# Altium PCB PCB2.PcbDoc
Units mm, origin at the board's own origin, x right, y up, seen from the top; angles counter-clockwise.
Board outline 99.69 x 73.02 mm, 2 copper layers (Top Layer, Bottom Layer); 42 components, 30 nets, 105 pads, 0 vias.
Unrouted connection lines stored in the file: 72.
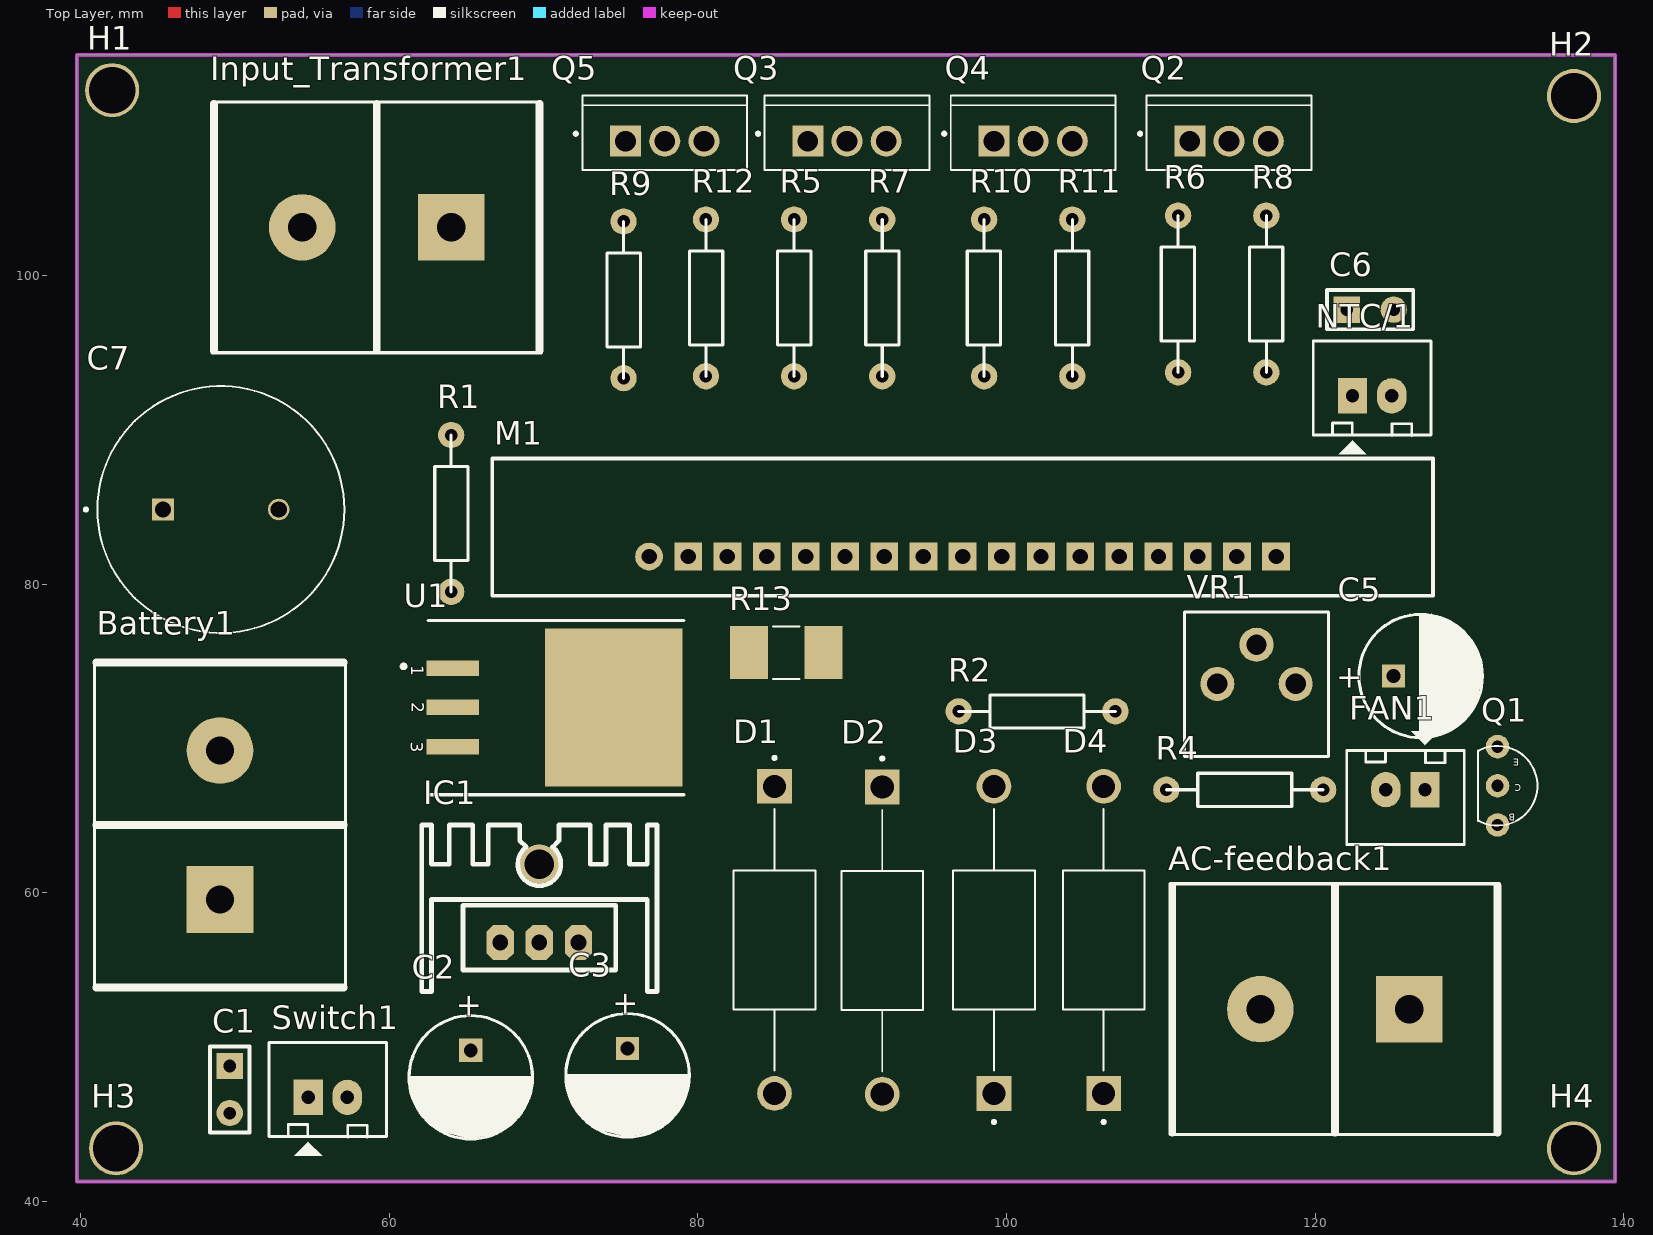
[diagram p0: Top Layer view]
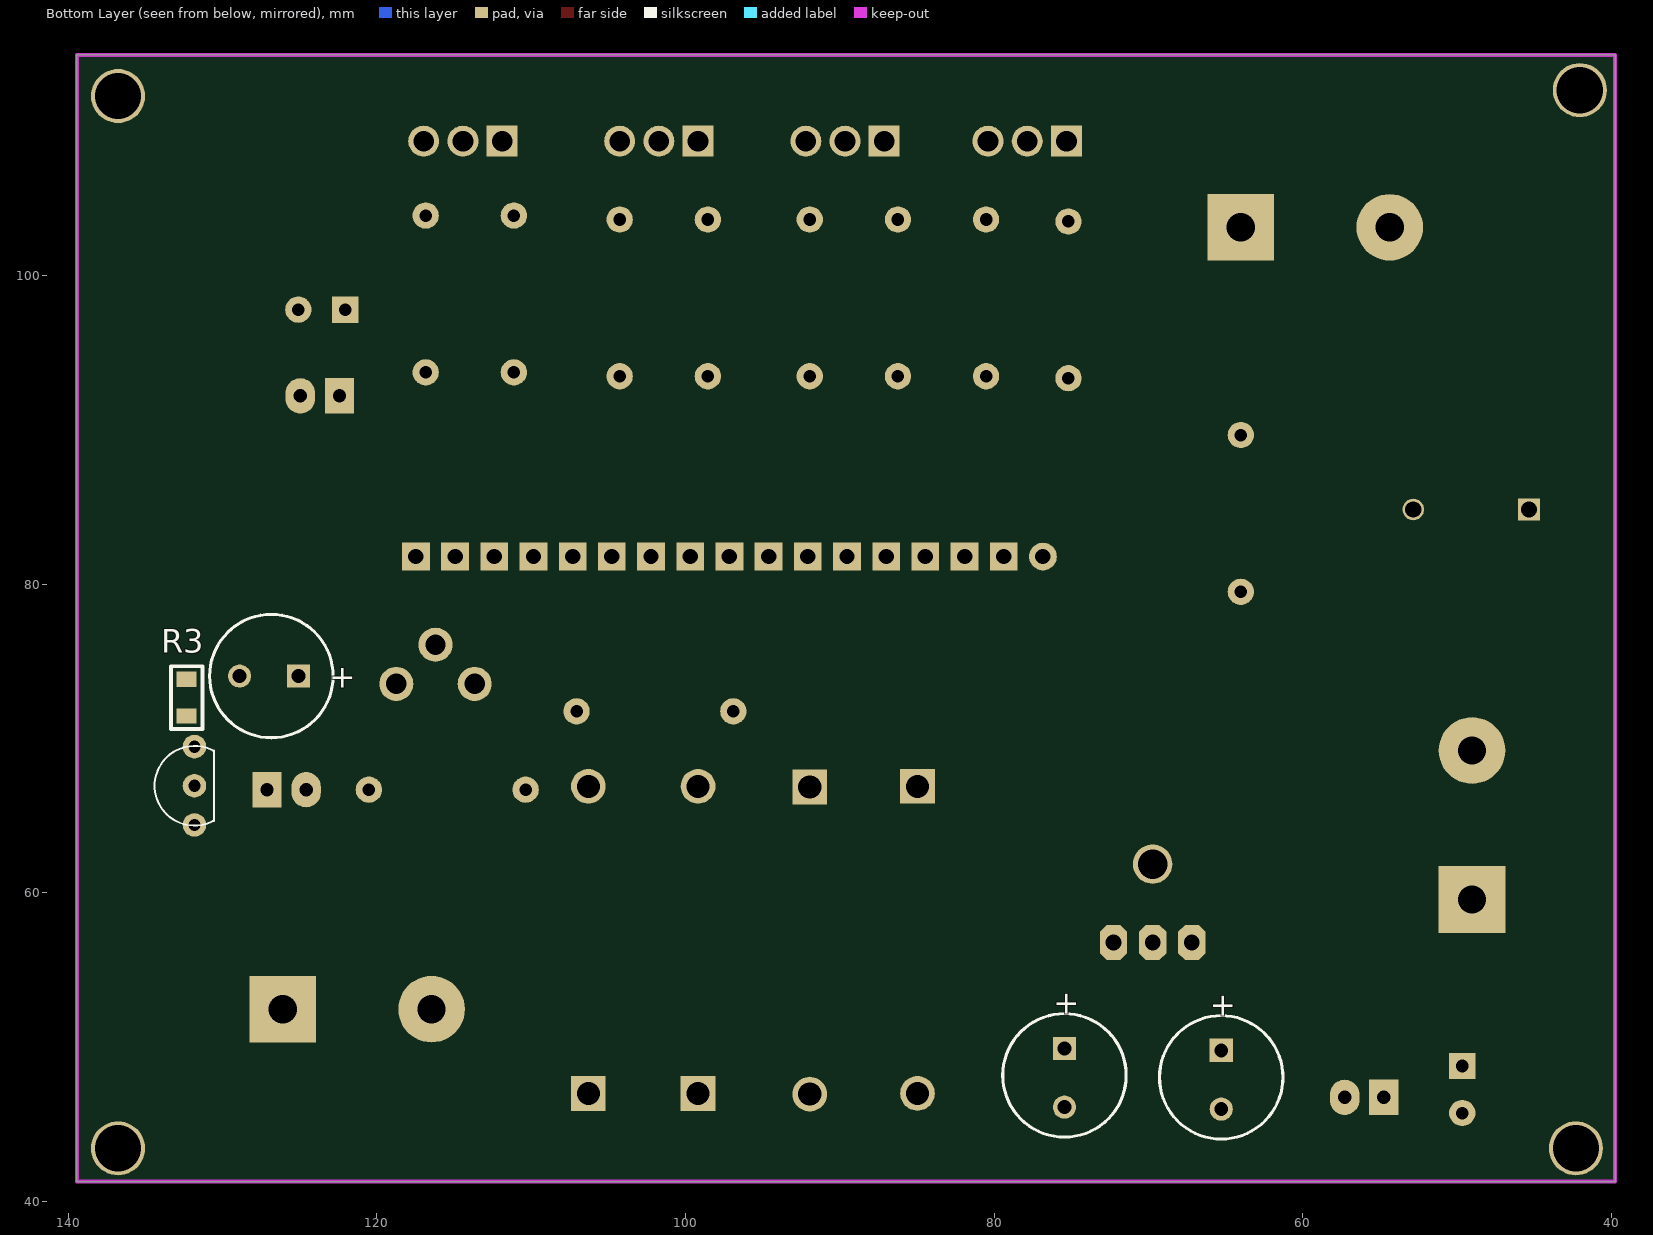
[diagram p1: Bottom Layer view, seen from below]

## Layer stack, top to bottom
Top Solder: solder mask 0.0102, Solder Resist, Dk 3.5
Top Layer: signal copper 0.0356
Dielectric 1: dielectric 0.32, FR-4, Dk 4.8
Bottom Layer: signal copper 0.0356
Bottom Solder: solder mask 0.0102, Solder Resist, Dk 3.5

## Board outline
39.751,41.275 39.751,114.3 139.446,114.3 139.446,41.275

## Design rules (kind name [scope] priority, off if disabled: settings)
Clearance [All] p1: gap=0.254 ignorepadtopadclearanceinfootprint=FALSE
PolygonConnect [All] p1: connectstyle=Relief reliefconductorwidth=0.254 reliefentries=4 polygonreliefangle="90 Angle" airgapwidth=0.254
RoutingVias [All] p1: holewidth=0.711 width=1.27 viastyle="Through Hole" minholewidth=0.711 minwidth=1.27 maxholewidth=0.711 maxwidth=1.27
SolderMaskExpansion [All] p1: expansion=0.102 istentingtop=FALSE
Width [All] p1: maxlimit=0.254 minlimit=0.254 preferedwidth=0.254
30 further rules are at their usual default settings.

## Components (designator, comment, footprint, x,y, rotation, side; value= is the part's Value field where it differs from the comment)
AC-feedback1 "Header 2" "PTBlock 2" 126.111,52.451 r180 top
Battery1 "Header 2" "PTBlock 2" 49.022,59.563 r90 top
C1 "Cap Non-pol" "Cap Non-Pol 3mm" 49.657,47.244 r270 top value=100nF
C2 "1uF" "RADIAL E" 65.278,49.784 r270 top
C3 "1uF" "RADIAL E" 75.438,49.911 r270 top
C5 "Cap Pol" "RADIAL E" 125.095,74.041 r0 top value=10uF
C6 "Cap Non-pol" "Cap Non-Pol 3mm" 123.571,97.79 r0 top value=100nF
C7 "1000uF" CAPPRD750W80D1600H2500 49.082,84.836 r0 top
D1 "1N5408G" DIOAD1990W125L900D530 84.963,56.94 r270 top
D2 "1N5408G" DIOAD1990W125L900D530 91.948,56.896 r270 top
D3 "1N5408G" DIOAD1990W125L900D530 99.187,56.94 r90 top
D4 "1N5408G" DIOAD1990W125L900D530 106.299,56.94 r90 top
FAN1 "JP2" CON2 127.127,66.675 r180 top value="Connector 2"
H1 "Hole" "LO KHOAN 3MM" 42.037,112.014 r0 top
H2 "Hole" "LO KHOAN 3MM" 136.779,111.633 r0 top
H3 "Hole" "LO KHOAN 3MM" 42.291,43.434 r0 top
H4 "Hole" "LO KHOAN 3MM" 136.779,43.434 r0 top
IC1 "LM7805" QTO-220H3 67.183,56.769 r0 top
Input_Transformer1 "Header 2" "PTBlock 2" 64.008,103.124 r180 top
M1 "EGS002" EGS002 89.535,81.788 r90 top
NTC/1 "JP2" CON2 122.428,92.202 r0 top value="Connector 2"
Q1 "C1815" TO92-ECB-W 131.826,66.929 r180 top
Q2 "IRF3205" TO254P1067X483X3124-3P 111.887,108.712 r0 top
Q3 "IRF3205" TO254P1067X483X3124-3P 87.122,108.712 r0 top
Q4 "IRF3205" TO254P1067X483X3124-3P 99.187,108.712 r0 top
Q5 "IRF3205" TO254P1067X483X3124-3P 75.311,108.712 r0 top
R1 "RESISTOR" "Res 10mm (1/2W)" 64.008,84.582 r90 top value=1K
R2 "RESISTOR" "Res 10mm (1/2W)" 101.981,71.755 r0 top value=100K
R3 "RESISTOR" R-0805 132.334,72.644 r270 bottom value=1K
R4 "RESISTOR" "Res 10mm (1/2W)" 115.443,66.675 r0 top value=100K
R5 "RESISTOR" "Res 10mm (1/2W)" 86.233,98.552 r90 top value=10R
R6 "RESISTOR" "Res 10mm (1/2W)" 111.125,98.806 r270 top value=10R
R7 "RESISTOR" "Res 10mm (1/2W)" 91.948,98.552 r90 top value=100K
R8 "RESISTOR" "Res 10mm (1/2W)" 116.84,98.806 r270 top value=100K
R9 "RESISTOR" "Res 10mm (1/2W)" 75.184,98.425 r90 top value=10R
R10 "RESISTOR" "Res 10mm (1/2W)" 98.552,98.552 r270 top value=10R
R11 "RESISTOR" "Res 10mm (1/2W)" 104.267,98.552 r270 top value=100K
R12 "RESISTOR" "Res 10mm (1/2W)" 80.518,98.552 r90 top value=100K
R13 "0.01" RESC6432X75N 85.725,75.565 r0 top
Switch1 "JP2" CON2 54.737,46.736 r0 top value="Connector 2"
U1 "IRF9540" TO-263 64.09,74.543 r270 top
VR1 "Variable Resistor" VRes-S 113.665,70.993 r0 top value=1K

## Footprints (in the part's own frame and the unit in brackets; to place one, negate y for a bottom-side part, rotate by r counter-clockwise, add the part's x,y. Pads: shape width x height; smd on the part's side, far side on the other; paste and mask are expansions set on the pad)
"Cap Non-Pol 3mm" [mil] "Capacitor, Radial; Body 5.6 x 2.5 mm (L x W typ); Pin Spacing 3 mm (typ); Solder Pad 35mil"
  rect 67x67 hole 32: 1(-60,0)
  round 67 hole 32: 2(60,0)
  silkscreen extent -110,-50 110,50, body extent -115,-33 115,34, height 245
CAPPRD750W80D1600H2500 [mm]
  round 1.4 hole 1.05: N(3.75,0)
  rect 1.4x1.4 hole 1.05: P(-3.75,0)
  silkscreen extent -8.85,-8 8,8, body extent -8,-8 8,8, height 25
CON2 [mil] "CON2"
  rect 75x90 hole 34: 1(0,0)
  oval 75x90 hole 34: 2(100,0)
  silkscreen extent -100,-150 200,140, body extent -68,-70 168,107, height 236
DIOAD1990W125L900D530 [mm]
  round 2.25 hole 1.5: A(9.95,0)
  rect 2.25x2.25 / inner round 2.25 / far side rect 2.25x2.25 hole 1.5: C(-9.95,0)
  silkscreen extent -11.9,-2.65 8.47,2.65, body extent -8.13,-2.65 8.13,2.65, height 5.3
EGS002 [mm]
  round 1.8 hole 1: P$1(0,12.7)
  rect 1.8x1.8 / inner round 1.8 / far side rect 1.8x1.8 hole 1: P$2(0,10.16) P$3(0,7.62) P$4(0,5.08) P$5(0,2.54) P$6(0,0) P$7(0,-2.54) P$8(0,-5.08) P$9(0,-7.62) P$10(0,-10.16) P$11(0,-12.7) P$12(0,-15.24) P$13(0,-17.78) P$14(0,-20.32) P$15(0,-22.86) P$16(0,-25.4) P$17(0,-27.94)
  silkscreen extent -2.54,-38.1 6.35,22.86, body extent -0.27,-38.25 4.83,22.75, height 37.08
"LO KHOAN 3MM" [mil]
  round 138 hole 118.1: 1(0,0)
"PTBlock 2" [mil] "Connector; Terminal; Power; 2 Positions; Solder Pad 35mil"
  rect 170x170 hole 72: 1(0,0)
  round 170 hole 72: 2(380,0)
  silkscreen extent -230,-320 610,320, body extent -245,-324 625,324, height 472
QTO-220H3 [mil] "TO-220 1-2-3"
  oct 70x90 hole 40: 1(0,0) 2(100,0) 3(200,0)
  round 100 hole 75: 2(100,200)
  silkscreen extent -200,-125 400,300, body extent -190,-102 392,323, height 984
R-0805 [mm] "Chip Resistor; Body 2.0 x 1.3 mm (LxW typ) [2012]"
  rect 1x1.3 smd: 1(-1.194,0) 2(1.194,0)
  silkscreen extent -2.03,-1.02 2.03,1.02, body extent -0.95,-0.65 0.95,0.65, height 0.63
"RADIAL E" [mm] "Capacitor, Electrolytic, Radial; Body 8 x 10.5 mm (Dia.xH typ); Pin Spacing 3.5 mm (typ)"
  rect 1.5x1.5 hole 0.9: 1(0,0)
  round 1.5 hole 0.9: 2(3.81,0)
  silkscreen extent -2.25,-4 5.75,4, body extent -2.24,-3.99 5.76,4.01, height 11.74
"Res 10mm (1/2W)" [mil] "Resistor; 2 Leads; 1/2W; Solder Pad 35mil"
  round 67 hole 32: 1(-200,0) 2(200,0)
  silkscreen extent -200,-43 200,42, body extent -212,-46 212,45, height 96
RESC6432X75N [mm]
  rect 2.46x3.42 smd: 1(-2.425,0) 2(2.425,0)
  silkscreen extent -0.87,-1.7 0.87,1.7, body extent -3.2,-1.6 3.2,1.6, height 0.75
TO92-ECB-W [mil] "C1815"
  round 60 hole 31.49 unplated: 1(0,100) 2(0,-100) 3(0,0)
  silkscreen extent -101,-102 50,102, body extent -90,-111 48,112, height 315
TO254P1067X483X3124-3P [mm]
  rect 2.01x2.01 / inner round 2.01 / far side rect 2.01x2.01 hole 1.34: 1(0,0)
  round 2.01 hole 1.34: 2(2.54,0) 3(5.08,0)
  silkscreen extent -3.33,-1.87 7.88,2.96, body extent -2.54,-1.71 7.62,2.48, height 20.57
TO-263 [mm]
  rect 1x3.4 smd: 1(-0.006,0.009) 2(2.534,0.009) 3(5.074,0.009)
  rect 10.25x8.9 smd: 2(2.534,10.459)
  silkscreen extent -3.11,-3.29 8.19,15.01, body extent -2.46,-1.15 7.54,14.21, height 4.5
VRes-S [mil] "Potentiometer; 3 Leads; Square; Solder pad 35mil"
  round 87 hole 52: 1(0,100) 2(100,200) 3(200,100)
  silkscreen extent -84,-86 284,283, body extent -88,-89 288,286, height 300

## Part data
AC-feedback1 Battery1 Input_Transformer1: "Header, 2-Pin", LatestRevisionDate=17-Jul-2002, LatestRevisionNote="Re-released for DXP Platform.", Publisher="Altium Limited"
C1 C6: "Non-polarized Capacitor", LatestRevisionDate=17-Jul-2002, LatestRevisionNote="Re-released for DXP Platform.", PackageReference=RAD-0.3, Published=8-Jun-2000, Publisher="Altium Limited"
C2 C3: library part Cap_Pol, "Polarized Capacitor", Capacitor Type=Tant, Manufacturer=FARNELL, Volt=25V, AEMS Code=2100110, ComponentLink1Description="Digikey Part Link", ComponentLink2Description="Open Datasheet", ComponentLink2URL=H:\LIBRARY\LIBRARY.Datasheet\, Published=13-April-2009, Publisher="Hoang Nguyen", Vendor=Digikey
C5: "Polarized Capacitor", LatestRevisionDate=17-Jul-2002, LatestRevisionNote="Re-released for DXP Platform.", PackageReference=POLAR0.8, Published=8-Jun-2000, Publisher="Altium Limited"
C7: library part EEUTA1V102, "CAP ALUM 1000UF 20% 35V RADIAL", Package="RADIAL-2 Panasonic", Availability="In Stock", Check_prices=https://www.snapeda.com/parts/EEU-TA1V102/Panasonic/view-part/6222203/?ref=eda, MF="Panasonic Electronic Components", MP=EEU-TA1V102, Price=None, Purchase-URL=https://pricing.snapeda.com/search/part/EEU-TA1V102/?ref=eda, SnapEDA_Link=https://www.snapeda.com/parts/EEU-TA1V102/Panasonic/view-part/6222203/?ref=snap
D1 D2 D3 D4: "DIODE GEN PURP 1KV 3A DO201AD", Package="AXIAL LEAD-2 ON Semiconductor", Check_prices=https://www.snapeda.com/parts/1N5408G/Onsemi/view-part/?ref=eda, MF=ON, MP=1N5408G, SnapEDA_Link=https://www.snapeda.com/parts/1N5408G/Onsemi/view-part/?ref=snap
FAN1 NTC/1 Switch1: library part Con2, "Connector 2"
H1 H2 H3 H4: "Hole 3mm"
IC1: library part LM78xx_1, "On ap +, from + 5 to + 24VDC"
M1: "EGS002 is a driver board specific for single phase sinusoid inverter. It uses ASIC EG8010 as control chip and IR2110S as driver chip.", Package=Package, Availability="Not in stock", Check_prices=https://www.snapeda.com/parts/EGS002/EGmicro/view-part/?ref=eda, MF=EGmicro, MP=EGS002, Price=None, SnapEDA_Link=https://www.snapeda.com/parts/EGS002/EGmicro/view-part/?ref=snap
Q1: "Q2SC1815", PSpiceTemplate="Q^@REFDES %c %b %e @MODEL", COMPONENT=2SC1815, ComponentLink1Description="Digikey Part Link", ComponentLink2Description="Open Datasheet", ComponentLink2URL=H:\LIBRARY\LIBRARY.Datasheet\, Price=500VND, Published=13-April-2009, Publisher="Hoang Nguyen", Vendor=Digikey
Q2 Q3 Q4 Q5: library part IRF3205PBF, "MOSFET, Power,N-Ch,VDSS 55V,RDS(ON) 8 Milliohms,ID 110A,TO-220AB,PD 200W,gFS 44S", Package="TO-220-3 Infineon", Check_prices=https://www.snapeda.com/parts/IRF3205PBF/Infineon/view-part/?ref=eda, MF="Infineon Technologies", MP=IRF3205PBF, SnapEDA_Link=https://www.snapeda.com/parts/IRF3205PBF/Infineon/view-part/?ref=snap
R1 R2 R3 R4 R5 R6 R7 R8 R9 R10 R11 R12: "Resistor", LatestRevisionDate=17-Jul-2002, LatestRevisionNote="Re-released for DXP Platform.", PackageReference=AXIAL-0.3, Published=8-Jun-2000, Publisher="Altium Limited"
R13: library part CRS2512-FW-1R00ELF, "CRS Series Anti-surge Resistor 2512 Case 1Ohms 2W +/-200ppm/degC", Package="6432 Bourns", Check_prices=https://www.snapeda.com/parts/CRS2512-FW-1R00ELF/Bourns/view-part/?ref=eda, MF=Bourns, MP=CRS2512-FW-1R00ELF, SnapEDA_Link=https://www.snapeda.com/parts/CRS2512-FW-1R00ELF/Bourns/view-part/?ref=snap
U1: "IRF9540 - P-CHANNEL POWER MOSFETS", ComponentLink1Description="Digikey Part Link", ComponentLink2Description="Open Datasheet", ComponentLink2URL=H:\LIBRARY\LIBRARY.Datasheet\IRF9540.pdf, Price="7.000 VND", Published=13-April-2009, Publisher="Hoang Nguyen", Vendor=Digikey
VR1: LatestRevisionDate=17-Jul-2002, LatestRevisionNote="Re-released for DXP Platform.", PackageReference=AXIAL-0.3, Published=8-Jun-2000, Publisher="Altium Limited"

## Nets (pads, with @x,y where several pads share a name; then routed paths per layer and width w, separated by ;. In a path a pad name is that pad's centre, name@x,y a point inside that pad or via, vN(x,y) a via of type N, cw(c..) or ccw(c..) an arc to the next point about the centre after c; other vN are vias at no path point)
+5: C3.1 IC1.3 M1.P$14 NTC/1.1
+12: Battery1.2 C1.2 C7.P FAN1.2 M1.P$12 Q2.2 Q3.3 R1.2 Switch1.1
GND: C1.1 C2.2 C3.2 C6.1 C7.N IC1.2 Q1.2 Q4.3 Q5.2 R11.1 R12.2 U1.2
L: AC-feedback1.1 D2.A D4.A
N: AC-feedback1.2 D1.A D3.A
NetBattery1_1: Battery1.1 U1.3
NetC2_1: C2.1 IC1.1 Switch1.2
NetC4_2: 
NetC5_1: C5.1 M1.P$15 VR1.2
NetC5_2: C5.2 R4.2 VR1.3
NetC6_2: C6.2 M1.P$16 NTC/1.2
NetD1_C: D1.C D2.C R2.1
NetD3_C: D3.C D4.C R4.1
NetFAN1_1: FAN1.1 Q1.3
NetM1_P$1: M1.P$1 R13.1
NetM1_P$2: M1.P$2 M1.P$4 M1.P$7 M1.P$11 M1.P$13 R13.2
NetM1_P$3: M1.P$3 R9.1 R12.1
NetM1_P$6: M1.P$6 R5.1 R7.1
NetM1_P$8: M1.P$8 R10.2 R11.2
NetM1_P$10: M1.P$10 R6.2 R8.2
NetM1_P$17: M1.P$17 R3.1
NetQ1_1: Q1.1 R3.2
NetQ2_1: Q2.1 R6.1
NetQ3_1: Q3.1 R5.2
NetQ4_1: Q4.1 R10.1
NetQ5_1: Q5.1 R9.2
NetR1_1: R1.1 U1.1
NetR2_2: R2.2 VR1.1
TR1: Input_Transformer1.2 M1.P$9 Q2.3 Q4.2 R8.1
TR2: Input_Transformer1.1 M1.P$5 Q3.2 Q5.3 R7.2
pads on no net: H1.1 H2.1 H3.1 H4.1

## Keep-outs
Keep-Out Layer:
  the board outline again, w0.254

## Text inside footprints (layer, text, board x,y; h text height)
C2: Top Overlay "+" at 64.528,53.509 h1.5 r270; Bottom Overlay "+" at 64.528,53.509 h1.5 r270
C3: Top Overlay "+" at 74.688,53.636 h1.5 r270; Bottom Overlay "+" at 74.688,53.636 h1.5 r270
C5: Top Overlay "+" at 121.37,73.291 h1.5; Bottom Overlay "+" at 121.37,73.291 h1.5
Q1: Top Overlay "E" at 133.223,68.834 h0.76 r180; Top Overlay "B" at 132.969,65.278 h0.76 r180; Top Overlay "C" at 133.35,67.183 h0.76 r180
U1: Top Overlay "1" at 61.424,74.744 h0.8 r270; Top Overlay "3" at 61.399,69.769 h0.8 r270; Top Overlay "2" at 61.437,72.331 h0.8 r270